# Altium PCB PCB1.PcbDoc (part 1 of 3)
Units mm, origin at the board's own origin, x right, y up, seen from the top; angles counter-clockwise.
Board outline 176 x 144.01 mm, 2 copper layers (Top Layer, Bottom Layer); 148 components, 189 nets, 767 pads, 256 vias.
Unrouted connection lines stored in the file: 30.
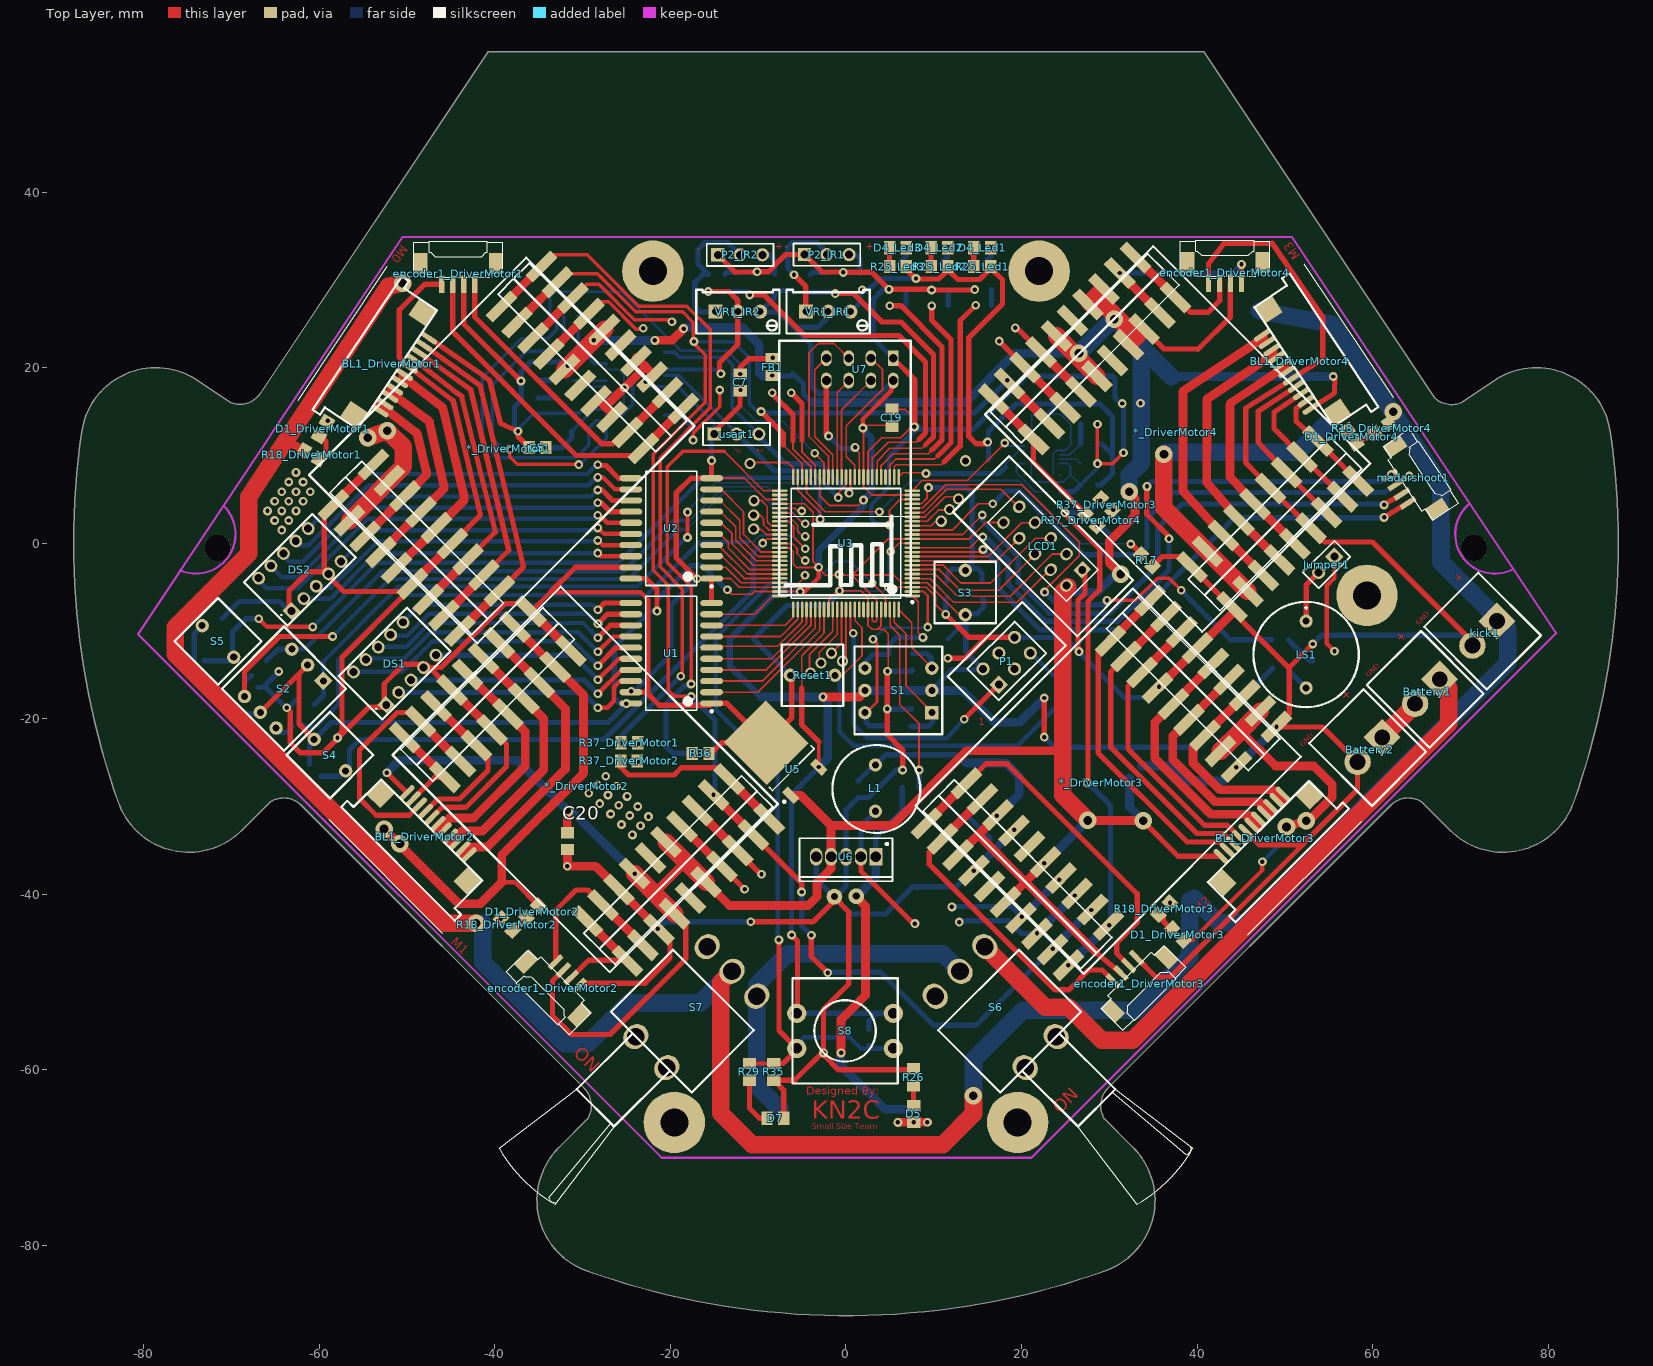
[diagram p0: Top Layer view]
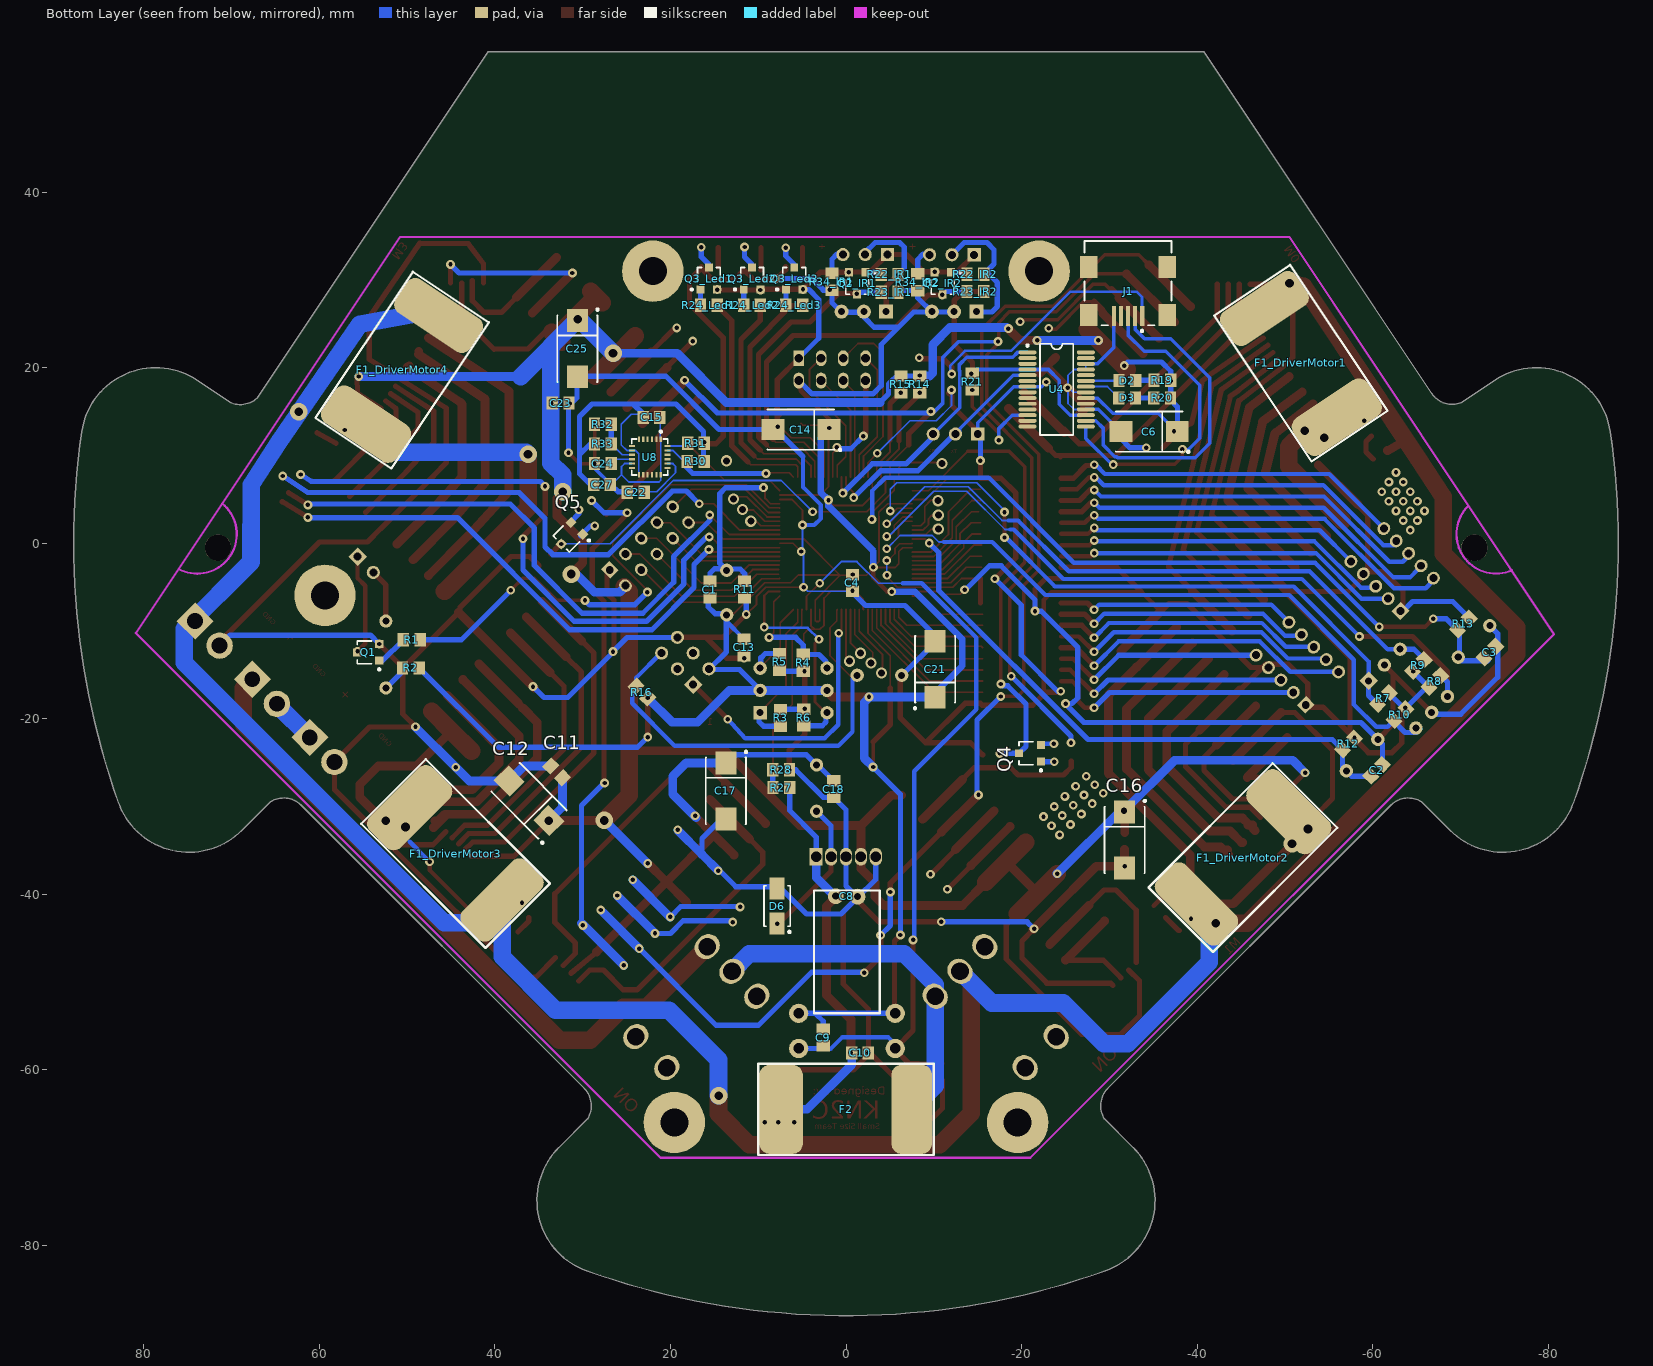
[diagram p1: Bottom Layer view, seen from below]

## Layer stack, top to bottom
Top Layer: signal copper 0.0356
Dielectric: dielectric 0.32, FR-4, Dk 4.8
Bottom Layer: signal copper 0.0356

## Board outline
-62.128,-29.795 -29.795,-62.128 cw(c-31.856,-64.08) -29.44,-65.57 -32.714,-68.845 ccw(c-26.693,-74.867) -29.553,-82.889 ccw(c0,0) 29.554,-82.889 ccw(c26.694,-74.867) 32.715,-68.845 29.44,-65.57 cw(c31.857,-64.08) 29.796,-62.128 62.129,-29.795 cw(c64.081,-31.856) 65.571,-29.44 68.846,-32.714 ccw(c74.868,-26.693) 82.89,-29.553 ccw(c0,0) 87.076,12.724 ccw(c78.649,11.492) 73.925,18.578 70.072,16.009 cw(c69.01,18.642) 67.082,16.558 40.776,56.017 -40.775,56.017 -66.765,17.033 cw(c-69.083,18.671) -70.071,16.009 -73.924,18.578 ccw(c-78.648,11.492) -87.075,12.724 ccw(c0,0) -82.889,-29.553 ccw(c-74.867,-26.693) -68.845,-32.714 -65.57,-29.44 cw(c-64.08,-31.856)

## Design rules (kind name [scope] priority, off if disabled: settings)
Clearance Clearance_3 [InNamedPolygon('Top Layer-gnd') Or  InNamedPolygon('Bottom Layer-gnd')] p1: gap=0.5
Clearance [All] p2: gap=0.2
FabricationTestPointUsage TestPointUsage [All] p1: valid=0 allowmultiple=FALSE
FabricationTestpoint Testpoint [(IsPad And (OnTopLayer Or OnBottomLayer))] p1: side=3 testpointundercomponent=TRUE minsize=1.016 maxsize=2.54 preferedsize=1.524 minholesize=0 maxholesize=1.016 preferedholesize=0.813 testpointgrid=0.025 allowsidetop=TRUE allowsidebottom=TRUE usegrid=TRUE gridtolerance=0
HoleSize [All] p1: absolutevalues=TRUE maxlimit=8 minlimit=0.025 maxpercent=80.000 minpercent=20.000
PolygonConnect [All] p1: connectstyle=Direct reliefconductorwidth=0.254 reliefentries=4 polygonreliefangle="90 Angle" airgapwidth=0.254
RoutingVias [All] p1: holewidth=0.5 width=1 viastyle="Through Hole" minholewidth=0.5 minwidth=1 maxholewidth=2 maxwidth=2
SilkToSolderMaskClearance SilkscreenOverComponentPads [IsPad] p1: minsilkscreentomaskgap=0.254 clearancetoexposedcopper=TRUE
SolderMaskExpansion [All] p1: expansion=0.102
Width [All] p1: maxlimit=2 minlimit=0.2 preferedwidth=0.2
24 further rules are at their usual default settings.

## Classes and differential pairs
net class TX_DRIVER[1..4]: TX_DRIVER1 TX_DRIVER2 TX_DRIVER3 TX_DRIVER4
component class atxmega128a1: C1 C2 C3 DS1 DS2 Jumper1 LCD1 LS1 P1 Q1 R1 R2 R3 R4 R5 R6 R7 R8 R9 R10 R11 R12 R13 R16 R17 R36 Reset1 S1 S2 S3 S4 S5 U1 U2 U3
component class DriverMotor1: *_DriverMotor1 BL1_DriverMotor1 D1_DriverMotor1 encoder1_DriverMotor1 F1_DriverMotor1 R18_DriverMotor1 R37_DriverMotor1
component class DriverMotor2: *_DriverMotor2 BL1_DriverMotor2 D1_DriverMotor2 encoder1_DriverMotor2 F1_DriverMotor2 R18_DriverMotor2 R37_DriverMotor2
component class DriverMotor3: *_DriverMotor3 BL1_DriverMotor3 D1_DriverMotor3 encoder1_DriverMotor3 F1_DriverMotor3 R18_DriverMotor3 R37_DriverMotor3
component class DriverMotor4: *_DriverMotor4 BL1_DriverMotor4 D1_DriverMotor4 encoder1_DriverMotor4 F1_DriverMotor4 R18_DriverMotor4 R37_DriverMotor4
component class FT232: C4 C5 C6 C7 D2 D3 FB1 J1 R19 R20 R21 U4 usart1
component class Led1: D4_Led1 Q3_Led1 R24_Led1 R25_Led1
component class Led2: D4_Led2 Q3_Led2 R24_Led2 R25_Led2
component class Led3: D4_Led3 Q3_Led3 R24_Led3 R25_Led3
component class "Main Sheet": madarshoot1 Q4 Q5 R14 R15
component class Power: Battery1 Battery2 C8 C9 C10 C11 C12 C13 C14 C16 C17 C18 C19 C20 C21 C23 C25 D5 D6 D7 F2 kick1 L1 R26 R27 R28 R29 R35 S6 S7 S8 U5 U6
component class Transceiver: U7
net class LED[1..3]: LED1 LED2 LED3
channel class "Driver Motor": DriverMotor1 DriverMotor2 DriverMotor3 DriverMotor4
channel class Led: Led1 Led2 Led3
component class IR1: P2_IR1 Q2_IR1 R22_IR1 R23_IR1 R34_IR1 VR1_IR1
component class IR2: P2_IR2 Q2_IR2 R22_IR2 R23_IR2 R34_IR2 VR1_IR2
net class IR[1..2]: IR1 IR2
channel class IR: IR1 IR2
component class sensor10DOF-S: C15 C22 C24 C27 R30 R31 R32 R33 U8

## Components (designator, comment, footprint, x,y, rotation, side; value= is the part's Value field where it differs from the comment)
*_DriverMotor1 "Driver Board" "DRIVER BOARD" -39.319,10.744 r135 top locked (schematic designator *)
*_DriverMotor2 "Driver Board" "DRIVER BOARD" -29.54,-26.797 r45 top locked (schematic designator *)
*_DriverMotor3 "Driver Board" "DRIVER BOARD" 29.972,-27.28 r315 top locked (schematic designator *)
*_DriverMotor4 "Driver Board" "DRIVER BOARD" 37.617,11.786 r225 top locked (schematic designator *)
Battery1 "Header 2B" BHDR1X2 66.243,-16.891 r315 top
Battery2 "Header 2B" BHDR1X2 59.69,-23.52 r315 top
BL1_DriverMotor1 "BLDC" FLT11 -51.892,20.295 r56.31 top (schematic designator BL1)
BL1_DriverMotor2 "BLDC" FLT11 -47.828,-33.299 r135 top (schematic designator BL1)
BL1_DriverMotor3 "BLDC" FLT11 47.625,-33.477 r225 top locked (schematic designator BL1)
BL1_DriverMotor4 "BLDC" FLT11 51.791,20.599 r303.69 top locked (schematic designator BL1)
C1 "Cap_UP" 2012[0805] 15.502,-5.286 r270 bottom
C2 "Cap_UP" 2012[0805] -60.452,-25.857 r135 bottom
C3 "Cap_UP" 2012[0805] -73.355,-12.395 r135 bottom
C4 "Cap_UP" 2012[0805] -0.737,-4.521 r90 bottom
C5 "Cap_UP" 2012[0805] -35.154,10.897 r180 top
C6 "Cap_El" 7343 -34.544,12.725 r0 bottom
C7 "Cap_UP" 2012[0805] -12.04,18.339 r90 top
C8 "Cap_El" CAP1000U-16 3.658,-39.548 r270 bottom
C9 "Cap_UP" 2012[0805] 2.591,-56.312 r90 bottom
C10 "Cap_UP" 2012[0805] -1.6,-58.064 r0 bottom
C11 "Cap_UP" 2012[0805] 32.969,-26.035 r225 bottom
C12 "Cap_El" 7343 36.119,-29.337 r45 bottom
C13 "Cap_UP" 2012[0805] 11.608,-11.862 r90 bottom
C14 "Cap_El" 7343 5.131,12.954 r0 bottom
C15 "100nF" 2012[0805] 22.149,14.351 r180 bottom
C16 "Cap_El" 7343 -31.75,-33.807 r270 bottom
C17 "Cap_El" 7343 13.691,-28.219 r270 bottom
C18 "Cap_UP" 2012[0805] 1.397,-28.016 r90 bottom
C19 "Cap_UP" 2012[0805] 5.232,14.3 r270 top
C20 "Cap_UP" 2012[0805] -31.725,-33.934 r90 top
C21 "Cap_El" 7343 -10.16,-14.351 r90 bottom
C22 "2.2nF" 2012[0805] 23.952,5.817 r180 bottom
C23 "Cap_UP" 2012[0805] 32.512,15.977 r0 bottom
C24 "100nF" 2012[0805] 27.703,9.085 r180 bottom
C25 "Cap_El" 7343 30.607,22.174 r270 bottom
C27 "100nF" 2012[0805] 27.788,6.68 r0 bottom
D1_DriverMotor1 "Diode" 2012[0805] -59.588,13.03 r60 top (schematic designator D1)
D1_DriverMotor2 "Diode" 2012[0805] -35.738,-41.961 r45 top (schematic designator D1)
D1_DriverMotor3 "Diode" 2012[0805] 37.821,-44.577 r315 top (schematic designator D1)
D1_DriverMotor4 "Diode" 2012[0805] 57.633,12.116 r123.69 top (schematic designator D1)
D2 "Diode" 2012[0805] -32.055,18.542 r0 bottom
D3 "Diode" 2012[0805] -32.029,16.561 r0 bottom
D4_Led1 "Diode" 2012[0805] 15.519,33.68 r0 top (schematic designator D4)
D4_Led2 "Diode" 2012[0805] 10.643,33.68 r0 top (schematic designator D4)
D4_Led3 "Diode" 2012[0805] 5.918,33.68 r0 top (schematic designator D4)
D5 "Diode" 2012[0805] 7.722,-65.014 r90 top
D6 "Diode" US1M 7.849,-41.326 r270 bottom
D7 "Diode" 2012[0805] -8.052,-65.507 r0 top
DS1 "7Seg Blue-CC" "7Segment Small" -51.422,-13.703 r315 top
DS2 "7Seg Blue-CC" "7Segment Small" -62.23,-3.023 r315 top
encoder1_DriverMotor1 "Header 2X2" "encoder 4pin" -44.171,31.826 r0 top (schematic designator encoder1)
encoder1_DriverMotor2 "Header 2X2" "encoder 4pin" -33.376,-50.673 r135 top (schematic designator encoder1)
encoder1_DriverMotor3 "Header 2X2" "encoder 4pin" 33.401,-50.165 r225 top (schematic designator encoder1)
encoder1_DriverMotor4 "Header 2X2" "encoder 4pin" 43.18,31.953 r0 top (schematic designator encoder1)
F1_DriverMotor1 "Fuse" "FUSE KH" -51.816,20.523 r326.31 bottom locked (schematic designator F1)
F1_DriverMotor2 "Fuse" "FUSE KH" -45.212,-35.814 r225 bottom (schematic designator F1)
F1_DriverMotor3 "Fuse" "FUSE KH" 44.475,-35.357 r135 bottom (schematic designator F1)
F1_DriverMotor4 "Fuse" "FUSE KH" 50.571,19.736 r33.69 bottom (schematic designator F1)
F2 "Fuse" "FUSE KH" 0,-64.491 r90 bottom locked
FB1 "Ferrite Beed" 2012[0805] -8.407,20.066 r90 top
J1 "USB" USB_MINI -32.131,29.845 r0 bottom
Jumper1 "Header 2" HDR1X2 55.651,-1.524 r225 top
kick1 "Header 2B" BHDR1X2 72.771,-10.262 r315 top
L1 "Inductor" inductor 3.353,-27.889 r90 top
LCD1 "Header 5X2" HDRBOX2X5 22.454,-0.33 r135 top locked
LS1 "Buzzer" BUZZER 52.426,-12.675 r270 top
madarshoot1 "Header 4" sucket-smd-4pin 64.973,7.544 r303.7 top
P1 "Header 3X2" HDRBOX2X3 18.313,-13.411 r45 top
P2_IR1 "Encoder 1" HDR1X3 -4.724,32.893 r0 top (schematic designator P2)
P2_IR2 "Encoder 1" HDR1X3 -14.605,32.868 r0 top (schematic designator P2)
Q1 "2N2222" SOT-23 54.432,-12.421 r90 bottom
Q2_IR1 "2N2222" SOT-23 -1.27,29.616 r0 bottom (schematic designator Q2)
Q2_IR2 "2N2222" SOT-23 -11.024,29.616 r0 bottom (schematic designator Q2)
Q3_Led1 "2N2222" SOT-23 15.626,30.164 r180 bottom (schematic designator Q3)
Q3_Led2 "2N2222" SOT-23 10.698,30.164 r180 bottom (schematic designator Q3)
Q3_Led3 "2N2222" SOT-23 5.898,30.164 r180 bottom (schematic designator Q3)
Q4 "Diac-PNP" DIODE-COMCATHOD -21.022,-23.943 r90 bottom
Q5 "Diac-PNP" DIODE-COMCATHOD 31.496,0.838 r45 bottom
R1 "Res" 2012[0805] 49.479,-10.998 r0 bottom
R2 "Res" 2012[0805] 49.581,-14.199 r0 bottom
R3 "Res" 2012[0805] 7.446,-19.883 r270 bottom
R4 "Res" 2012[0805] 4.878,-13.615 r90 bottom
R5 "Res" 2012[0805] 7.572,-13.507 r90 bottom
R6 "Res" 2012[0805] 4.806,-19.865 r270 bottom
R7 "Res" 2012[0805] -61.239,-17.678 r315 bottom
R8 "Res" 2012[0805] -67.081,-15.723 r135 bottom
R9 "Res" 2012[0805] -65.202,-13.919 r135 bottom
R10 "Res" 2012[0805] -63.119,-19.507 r315 bottom
R11 "Res" 2012[0805] 11.549,-5.257 r270 bottom
R12 "Res" 2012[0805] -57.252,-22.86 r135 bottom
R13 "Res" 2012[0805] -70.333,-9.195 r135 bottom
R14 "Res" 2012[0805] -8.407,18.11 r90 bottom
R15 "Res" 2012[0805] -6.248,18.11 r90 bottom
R16 "10K" 2012[0805] 23.261,-16.952 r45 bottom
R17 "Res" 2012[0805] 34.265,-1.93 r135 top
R18_DriverMotor1 "Res" 2012[0805] -60.884,10.084 r330 top (schematic designator R18)
R18_DriverMotor2 "Res" 2012[0805] -38.633,-43.434 r315 top (schematic designator R18)
R18_DriverMotor3 "Res" 2012[0805] 36.246,-41.631 r225 top (schematic designator R18)
R18_DriverMotor4 "Res" 2012[0805] 61.062,13.106 r213.69 top (schematic designator R18)
R19 "Res" 2012[0805] -36.043,18.567 r180 bottom
R20 "Res" 2012[0805] -36.017,16.561 r180 bottom
R21 "Res" 2012[0805] -14.376,18.415 r90 bottom
R22_IR1 "Res" 2012[0805] -4.978,30.632 r180 bottom (schematic designator R22)
R22_IR2 "Res" 2012[0805] -14.732,30.658 r180 bottom (schematic designator R22)
R23_IR1 "Res" 2012[0805] -4.978,28.6 r0 bottom (schematic designator R23)
R23_IR2 "Res" 2012[0805] -14.732,28.677 r0 bottom (schematic designator R23)
R24_Led1 "Res" 2012[0805] 15.626,27.116 r0 bottom (schematic designator R24)
R24_Led2 "Res" 2012[0805] 10.698,27.116 r0 bottom (schematic designator R24)
R24_Led3 "Res" 2012[0805] 5.898,27.116 r0 bottom (schematic designator R24)
R25_Led1 "Res" 2012[0805] 15.519,31.521 r0 top (schematic designator R25)
R25_Led2 "Res" 2012[0805] 10.668,31.521 r0 top (schematic designator R25)
R25_Led3 "Res" 2012[0805] 5.918,31.521 r0 top (schematic designator R25)
R26 "Res" 2012[0805] 7.696,-60.833 r270 top
R27 "Res" 2012[0805] 7.366,-27.838 r180 bottom
R28 "Res" 2012[0805] 7.391,-25.806 r0 bottom
R29 "Res" 2012[0805] -10.998,-60.223 r90 top
R30 "4K7" 2012[0805] 17.12,9.322 r0 bottom
R31 "4K7" 2012[0805] 17.094,11.405 r0 bottom
R32 "1K-JSEL-MPU-MODE" 2012[0805] 27.703,13.555 r0 bottom
R33 "1K-JSEL-MPU-MODE" 2012[0805] 27.703,11.32 r180 bottom
R34_IR1 "Res" 2012[0805] 1.6,29.794 r90 bottom (schematic designator R34)
R34_IR2 "Res" 2012[0805] -8.179,29.743 r90 bottom (schematic designator R34)
R35 "Res" 2012[0805] -8.23,-60.223 r90 top
R36 "Res" 2012[0805] -16.561,-23.935 r180 top
R37_DriverMotor1 "Res" 2012[0805] -24.689,-22.716 r0 top (schematic designator R37)
R37_DriverMotor2 "Res" 2012[0805] -24.714,-24.799 r0 top (schematic designator R37)
R37_DriverMotor3 "Res" 2012[0805] 29.693,4.42 r315 top (schematic designator R37)
R37_DriverMotor4 "Res" 2012[0805] 27.96,2.651 r315 top (schematic designator R37)
Reset1 "SW-SPST" PUSH-BUT -3.81,-15.037 r270 top
S1 "SW-Hex" SW-HEX 5.969,-16.764 r90 top
S2 "SW-Hex" SW-HEX -64.033,-16.561 r135 top locked
S3 "SW-SPST" PUSH-BUT 13.589,-5.613 r180 top
S4 "SW-SPST" PUSH-BUT -58.801,-24.13 r45 top locked
S5 "SW-SPST" PUSH-BUT -71.552,-11.176 r45 top locked
S6 "SW-SPDT" KEYKHRAB 18.644,-54.432 r135 top
S7 "SW-SPDT" KEYKHRAB -18.644,-54.432 r45 top
S8 "SW-SPST" "PUSH BUTTON B" 5.893,-49.555 r180 top locked
U1 "74ACT541SC" M20B_M -19.914,-12.522 r180 top locked
U2 "74ACT541SC" M20B_M -19.914,1.702 r180 top locked
U3 "ATXmega128A1" 100A_N 0,0 r180 top locked
U4 "FT232RL" SSOP28 -24.003,17.526 r270 bottom
U5 "LF33" D-PACK -7.772,-24.028 r135 top
U6 "LM2576HVT-5.0" T05A 0,-35.712 r180 top
U7 "nrf24L01" NRF24L01 5.385,21.082 r270 top locked
U8 "MPU6050" QFN_36 22.394,10.761 r0 bottom
usart1 "Encoder 1" HDR1X3 -15.011,12.446 r0 top
VR1_IR1 "Res Tap" MULTITURN -2.032,26.391 r0 top (schematic designator VR1)
VR1_IR2 "Res Tap" MULTITURN -12.319,26.391 r0 top (schematic designator VR1)

## Footprints (in the part's own frame and the unit in brackets; to place one, negate y for a bottom-side part, rotate by r counter-clockwise, add the part's x,y. Pads: shape width x height; smd on the part's side, far side on the other; paste and mask are expansions set on the pad)
"7Segment Small" [mm]
  rect 1.5x1.4 hole 0.9: 1(2.65,-4)
  oval 1.5x1.4 hole 0.9: 2(2.65,-2) 3(2.65,0) 4(2.65,2) 5(2.65,4) 6(-2.65,4) 7(-2.65,2) 8(-2.65,0) 9(-2.65,-2) 10(-2.65,-4)
  silkscreen extent -3.5,-5.5 3.5,5.5, body extent -3.54,-5.48 3.5,5.55, height 4.8
100A_N [mm] "Thin QFP, 100-Leads, Body 14x14mm, Pitch 0.5mm, IPC Medium Density"
  oval 1.8x0.3 smd: 1(-7.55,6) 2(-7.55,5.5) 3(-7.55,5) 4(-7.55,4.5) 5(-7.55,4) 6(-7.55,3.5) 7(-7.55,3) 8(-7.55,2.5) 9(-7.55,2) 10(-7.55,1.5) 11(-7.55,1) 12(-7.55,0.5) 13(-7.55,0) 14(-7.55,-0.5) 15(-7.55,-1) 16(-7.55,-1.5) 17(-7.55,-2) 18(-7.55,-2.5) 19(-7.55,-3) 20(-7.55,-3.5) 21(-7.55,-4) 22(-7.55,-4.5) 23(-7.55,-5) 24(-7.55,-5.5) 25(-7.55,-6) 51(7.55,-6) 52(7.55,-5.5) 53(7.55,-5) 54(7.55,-4.5) 55(7.55,-4) 56(7.55,-3.5) 57(7.55,-3) 58(7.55,-2.5) 59(7.55,-2) 60(7.55,-1.5) 61(7.55,-1) 62(7.55,-0.5) 63(7.55,0) 64(7.55,0.5) 65(7.55,1) 66(7.55,1.5) 67(7.55,2) 68(7.55,2.5) 69(7.55,3) 70(7.55,3.5) 71(7.55,4) 72(7.55,4.5) 73(7.55,5) 74(7.55,5.5) 75(7.55,6)
  oval 0.3x1.8 smd: 26(-6,-7.55) 27(-5.5,-7.55) 28(-5,-7.55) 29(-4.5,-7.55) 30(-4,-7.55) 31(-3.5,-7.55) 32(-3,-7.55) 33(-2.5,-7.55) 34(-2,-7.55) 35(-1.5,-7.55) 36(-1,-7.55) 37(-0.5,-7.55) 38(0,-7.55) 39(0.5,-7.55) 40(1,-7.55) 41(1.5,-7.55) 42(2,-7.55) 43(2.5,-7.55) 44(3,-7.55) 45(3.5,-7.55) 46(4,-7.55) 47(4.5,-7.55) 48(5,-7.55) 49(5.5,-7.55) 50(6,-7.55) 76(6,7.55) 77(5.5,7.55) 78(5,7.55) 79(4.5,7.55) 80(4,7.55) 81(3.5,7.55) 82(3,7.55) 83(2.5,7.55) 84(2,7.55) 85(1.5,7.55) 86(1,7.55) 87(0.5,7.55) 88(0,7.55) 89(-0.5,7.55) 90(-1,7.55) 91(-1.5,7.55) 92(-2,7.55) 93(-2.5,7.55) 94(-3,7.55) 95(-3.5,7.55) 96(-4,7.55) 97(-4.5,7.55) 98(-5,7.55) 99(-5.5,7.55) 100(-6,7.55)
  silkscreen extent -7.68,-6.25 6.25,6.82, body extent -7,-7 7,7, height 1.2
2012[0805] [mm] "Chip Resistor; Body 2.0 x 1.3 mm (LxW typ)"
  rect 1.3x1.5 smd: 1(-0.95,0) 2(0.95,0)
  body extent -1.22,-0.75 1.28,0.75, height 0.5
7343 [mm] "Capacitor, SM Tantalum; Body 7.3 x 4.3 mm (LxW typ)"
  rect 2.6x2.4 smd: 1(-3.2,0) 2(3.2,0)
  silkscreen extent -4.57,-2.3 3.8,2.42, body extent -3.9,-2.4 3.9,2.4, height 2
BHDR1X2 [mm]
  rect 3x3 hole 1.8: 1(0,1.98)
  round 3 hole 1.8: 2(0,-1.98)
  silkscreen extent -5.4,-4.35 4.7,4.35, body extent -5.53,-4.47 4.77,4.48, height 12.5
BUZZER [mm]
  round 1.5 hole 0.8: 1(-3.81,0) 2(3.81,0)
  silkscreen extent -6,-6 6,6, body extent -5.97,-6 5.97,5.97, height 9.3
CAP1000U-16 [mm]
  round 1.8 hole 0.8: 1(0.66,2.489) 2(0.711,4.978)
  silkscreen extent 0,0 14,7.5
D-PACK [mm] "D-PAK, 3-Pads, Body 6.2x6.7mm (max), IPC Medium Density"
  rect 1.9x0.95 smd: 1(-4.35,2.28) 3(-4.35,-2.28)
  rect 6.9x6.8 smd: 4(1.85,0)
  silkscreen extent -4.47,-3.35 -2,3.43, body extent -2.5,-3.35 3.7,3.35, height 2.38
DIODE-COMCATHOD [mm]
  rect 0.9x0.95 smd: 1(0.02,1.311) 2(-0.93,-1.189) 3(0.97,-1.189)
  silkscreen extent -2.05,-1.31 1.32,1.31, body extent -1.3,-0.31 1.35,1.31, height 2
"DRIVER BOARD" [mm]
  rect 1.2x4 smd: 1(11.43,-17.982) 1(11.43,-11.52) 2(8.89,-17.982) 2(8.89,-11.52) 3(6.35,-11.52) 3(6.35,-17.982) 4(3.81,-11.52) 4(3.81,-17.982) 5(1.27,-17.982) 5(1.27,-11.52) 6(-1.27,-11.52) 6(-1.27,-17.982) 7(-3.81,-17.982) 7(-3.81,-11.52) 8(-6.35,-17.982) 8(-6.35,-11.52) 9(-8.89,-11.52) 9(-8.89,-17.982) 10(-11.43,-11.52) 10(-11.43,-17.982) 11(8.966,17.982) 11(8.997,11.525) 12(6.426,17.982) 12(6.457,11.525) 13(3.886,17.982) 13(3.917,11.525) 14(1.346,17.982) 14(1.377,11.525) 15(-1.194,17.982) 15(-1.163,11.525) 16(-3.734,17.982) 16(-3.703,11.525) 17(-6.274,17.982) 17(-6.243,11.525) 18(-8.814,17.982) 18(-8.783,11.525) 19(-11.354,17.982) 19(-11.323,11.525)
  silkscreen extent -13.74,-17.46 13.36,17.54
"encoder 4pin" [mm]
  rect 1.6x2.4 smd: 0(-4.3,0.047) 0(4.3,0.047)
  rect 0.6x2 smd: 1(-1.875,-2.3) 2(-0.625,-2.3) 3(0.625,-2.3) 4(1.875,-2.3)
  silkscreen extent -5.07,-1.53 5.07,2.59, body extent -5.07,-2.15 5.07,2.62, height 3.5
FLT11 [mm]
  rect 2.2x2.4 smd: 0(-7,0.3) 0(7,0.3)
  oval 0.6x2.2 smd: 1(-5,-1.9) 2(-4,-1.9) 3(-3,-1.9) 4(-2,-1.9) 5(-1,-1.9) 6(0,-1.9) 7(1,-1.9) 8(2,-1.9) 9(3,-1.9) 10(4,-1.9) 11(5,-1.9)
  silkscreen extent -9.15,-0.9 9.15,6.56, body extent -9.15,-0.9 9.15,4.6, height 3
"FUSE KH" [mm]
  rrect50% 10.2x5 smd: 1(0,7.4)
  rrect50% 10.2x4.6 smd: 2(0,-7.48)
  silkscreen extent -5.2,-10 5.2,10
HDR1X2 [mm] "Connector; Header; 2 Position"
  rect 1.5x1.5 hole 0.9: 1(0,0)
  round 1.5 hole 0.9: 2(2.54,0)
  silkscreen extent -1.27,-1.27 3.81,1.27
HDR1X3 [mm] "Connector; Header; 3 Position"
  rect 1.5x1.5 hole 0.9: 1(0,0)
  round 1.5 hole 0.9: 2(2.54,0) 3(5.08,0)
  silkscreen extent -1.27,-1.27 6.35,1.27
HDRBOX2X3 [mm]
  rect 1.5x1.5 hole 0.9: 1(-2.54,-1.27)
  round 1.5 hole 0.9: 2(-2.54,1.27) 3(0,-1.27) 4(0,1.27) 5(2.54,-1.27) 6(2.54,1.27)
  silkscreen extent -6,-3.5 6,3.5, body extent -6,-3.53 6,3.47, height 4
HDRBOX2X5 [mm]
  rect 1.3x1.5 hole 0.9: 1(-5.062,-1.254)
  oval 1.3x1.5 hole 0.9: 2(-5.062,1.286) 3(-2.522,-1.254) 4(-2.522,1.286) 5(0.018,-1.254) 6(0.018,1.286) 7(2.558,-1.254) 8(2.558,1.286) 9(5.098,-1.254) 10(5.098,1.286)
  silkscreen extent -10,-4.5 10,4.5, body extent -10.03,-4.53 -9.97,4.45, height 4
inductor [mm]
  round 1.5 hole 0.8: 1(-2.64,0) 2(2.64,0)
  silkscreen extent -5.11,-5.11 4.91,4.9
KEYKHRAB [mm]
  oval 3x2.6 hole 2: 0(-5,-2.5) 0(-5,2.5) 1(8,4) 2(8,0) 3(8,-4)
  silkscreen extent -25.59,-6.5 5,6.5, body extent -25.6,-6.5 4.97,6.5, height 8
M20B_M [mm] "SOIC, 20-Leads, Body 12.8x7.5mm, Pitch 1.27mm, IPC Low Density"
  oval 2.6x0.7 smd: 1(-4.6,5.715) 2(-4.6,4.445) 3(-4.6,3.175) 4(-4.6,1.905) 5(-4.6,0.635) 6(-4.6,-0.635) 7(-4.6,-1.905) 8(-4.6,-3.175) 9(-4.6,-4.445) 10(-4.6,-5.715) 11(4.6,-5.715) 12(4.6,-4.445) 13(4.6,-3.175) 14(4.6,-1.905) 15(4.6,-0.635) 16(4.6,0.635) 17(4.6,1.905) 18(4.6,3.175) 19(4.6,4.445) 20(4.6,5.715)
  silkscreen extent -4.72,-6.5 2.9,6.74, body extent -3.75,-6.5 3.75,6.5, height 2.6
MULTITURN [mm]
  rect 1.6x1.6 hole 0.8: 1(-2.54,0)
  round 1.6 hole 0.8: 2(0,0) 3(2.54,0)
  silkscreen extent -4.75,-2.5 4.75,2.5, body extent -4.77,-2.5 4.72,2.52, height 4
NRF24L01 [mm]
  rect 1.8x1.2 hole 1: 1(0,0)
  oval 1.8x1.2 hole 1: 2(2.54,0) 3(0,-2.54) 4(2.54,-2.54) 5(0,-5.08) 6(2.54,-5.08) 7(0,-7.62) 8(2.54,-7.62)
  silkscreen extent -2,-13 27,2
"PUSH BUTTON B" [mm]
  round 2.2 hole 1.2: 1(0.5,8) 1(11.5,8) 2(0.5,4) 2(11.5,4)
  silkscreen extent 0,0 12,12
PUSH-BUT [mil]
  round 60 hole 31.5: 1(0,-100) 2(0,100)
  silkscreen extent -138,-138 138,138, body extent -139,-139 139,139, height 157
QFN_36 [mm]
  rect 0.25x0.65 smd: 1(-1.292,-1.094) 2(-0.792,-1.094) 3(-0.292,-1.094) 4(0.208,-1.094) 5(0.708,-1.094) 6(1.208,-1.094) 13(1.208,2.956) 14(0.708,2.956) 15(0.208,2.956) 16(-0.292,2.956) 17(-0.792,2.956) 18(-1.292,2.956)
  rect 0.65x0.25 smd: 7(1.983,-0.319) 8(1.983,0.181) 9(1.983,0.681) 10(1.983,1.181) 11(1.983,1.681) 12(1.983,2.181) 19(-2.067,2.181) 20(-2.067,1.681) 21(-2.067,1.181) 22(-2.067,0.681) 23(-2.067,0.181) 24(-2.067,-0.319)
  silkscreen extent -2.09,-2.09 2.01,2.98, body extent -2.09,-1.12 2.01,2.98, height 0.95
SOT-23 [mm] "SOT-23; 3 Leads; Body 3.0 x 2.6 mm, inc. leads (LxW max)"
  rect 0.9x0.95 smd: 1(0,1.25) 2(-0.95,-1.25) 3(0.95,-1.25)
  silkscreen extent -2.07,-1.37 1.3,1.25, body extent -1.33,-0.38 1.33,1.25, height 2
SSOP28 [mm] "SSOP; 28 Leads; Body Width 5.3 mm; Pitch 0.65 mm"
  oval 0.45x2.05 smd: 1(-4.225,-3.325) 2(-3.575,-3.325) 3(-2.925,-3.325) 4(-2.275,-3.325) 5(-1.625,-3.325) 6(-0.975,-3.325) 7(-0.325,-3.325) 8(0.325,-3.325) 9(0.975,-3.325) 10(1.625,-3.325) 11(2.275,-3.325) 12(2.925,-3.325) 13(3.575,-3.325) 14(4.225,-3.325) 15(4.225,3.325) 16(3.575,3.325) 17(2.925,3.325) 18(2.275,3.325) 19(1.625,3.325) 20(0.975,3.325) 21(0.325,3.325) 22(-0.325,3.325) 23(-0.975,3.325) 24(-1.625,3.325) 25(-2.275,3.325) 26(-2.925,3.325) 27(-3.575,3.325) 28(-4.225,3.325)
  silkscreen extent -5.2,-3.45 5.2,1.9, body extent -5.2,-2.4 5.23,2.42, height 2
sucket-smd-4pin [mm]
  rect 1.6x2.4 smd: 0(-4.238,-0.067) 0(4.362,-0.067)
  rect 0.6x2 smd: 1(-1.813,-2.414) 2(-0.563,-2.414) 3(0.687,-2.414) 4(1.937,-2.414)
  silkscreen extent -5.01,-1.64 5.14,2.48, body extent -5,-2.2 5.15,2.58, height 3.5
SW-HEX [mil]
  rect 60x60 hole 31.5: 1(-100,-150)
  round 60 hole 31.5: 2(0,-150) 3(100,-150) 4(100,150) 5(0,150) 6(-100,150)
  silkscreen extent -197,-197 197,197, body extent -198,-199 195,197, height 79
T05A [mm] "TO, Thru-Hole, Vertical, Heatsink Mounted; 5 In-Line Leads; Pitch 1.70 mm"
  rect 1.5x2 hole 1.2: 1(-3.4,0)
  oval 1.4x2 hole 1.2: 2(-1.7,0) 3(0,0) 4(1.7,0) 5(3.4,0)
  silkscreen extent -5.3,-2.1 5.3,2.8, body extent -5.35,-2.15 5.35,2.85, height 19.6
US1M [mm] "Molded Diode, 2-Leads, Body 4.3x2.6mm, IPC Medium Density"
  rect 2.5x1.7 smd: 1(-2,0) 2(2,0)
  silkscreen extent -2.3,-1.5 3.07,1.52, body extent -2.3,-1.46 2.3,1.46, height 2.3
USB_MINI [mm]
  rect 0.5x2.3 smd: 1(-1.6,3.95) 2(-0.8,3.95) 3(0,3.95) 4(0.8,3.95) 5(1.6,3.95)
  rect 2x2.5 smd: 6(4.45,3.85) 7(4.45,-1.65) 8(-4.45,3.85) 9(-4.45,-1.65)
  silkscreen extent -4.95,-4.6 4.95,5.77

## Part data
C1 C2 C3 C4 C5 C6 C7 C8 C9 C10 C11 C12 C13 C14 C16 C17 C18 C19 C20 C21 C23 C25: "Capacitor"
C15 C22 C24 C27: library part Cap, "Capacitor"
D1_DriverMotor1 D1_DriverMotor2 D1_DriverMotor3 D1_DriverMotor4 D2 D3 D4_Led1 D4_Led2 D4_Led3 D5 D6 D7: "1 Amp General Purpose Rectifier"
DS1 DS2: library part "7Seg Blue-CC_1", "14.2 mm General Purpose Blue 7-Segment Display: CC, RH DP, Gray Surface"
encoder1_DriverMotor1 encoder1_DriverMotor2 encoder1_DriverMotor3 encoder1_DriverMotor4: "Header, 2-Pin, Dual row"
J1: "USB 1.1, Right Angle, Thru-Hole, A Type, Receptacle, 4 Position, Black"
Jumper1: "Header, 2-Pin"
LCD1: "Header, 5-Pin, Dual row"
LS1: "Magnetic Transducer Buzzer"
madarshoot1: "Header, 4-Pin"
P1: "Header, 3-Pin, Dual row"
P2_IR1 P2_IR2 usart1: library part "Header 3", "Header, 3-Pin"
Q1 Q2_IR1 Q2_IR2 Q3_Led1 Q3_Led2 Q3_Led3: "NPN Bipolar Transistor"
Q4 Q5: "DIAC"
R1 R2 R3 R4 R5 R6 R7 R8 R9 R10 R11 R12 R13 R14 R15 R17 R18_DriverMotor1 R18_DriverMotor2 R18_DriverMotor3 R18_DriverMotor4 R19 R20 R21 R22_IR1 R22_IR2 R23_IR1 R23_IR2 R24_Led1 R24_Led2 R24_Led3 R25_Led1 R25_Led2 R25_Led3 R26 R27 R28 R29 R34_IR1 R34_IR2 R35 R36 R37_DriverMotor1 R37_DriverMotor2 R37_DriverMotor3 R37_DriverMotor4: "Semiconductor Resistor"
R16: library part Res, "Semiconductor Resistor"
R30 R31: library part Res3, "Resistor"
R32 R33: library part Res1, "Resistor"
Reset1 S3 S4 S5 S8: "Single-Pole, Single-Throw Switch"
S6 S7: "SPDT Subminiature Toggle Switch, Right Angle Mounting, Vertical Actuation"
U1 U2: "Octal Buffer/Line Driver with 3-State Output"
U5: library part 7805
U6: "SIMPLE SWITCHER; 3A Step-Down Voltage Regulator"
VR1_IR1 VR1_IR2: "Tapped Resistor"

## Free pads (board coordinates)
  round 7 hole 3.2: 0(-22,31) 0(-19.558,-65.989) 0(19.558,-65.989) 0(22,31) 0(59.363,-5.937)
  round 3 hole 3: sp(-71.603,-0.508) sp(71.552,-0.508)

## Via types
v1: diameter 1, hole 0.5, Top Layer to Bottom Layer, 225 vias
v2: diameter 2, hole 1, Top Layer to Bottom Layer, 17 vias
v3: diameter 1.27, hole 0.8, Top Layer to Bottom Layer, 12 vias
v4: diameter 1, hole 0.5, Top Layer to Bottom Layer, tented top, 1 vias
v5: diameter 1.27, hole 0.711, Top Layer to Bottom Layer, 1 vias

## Nets (pads, with @x,y where several pads share a name; then routed paths per layer and width w, separated by ;. In a path a pad name is that pad's centre, name@x,y a point inside that pad or via, vN(x,y) a via of type N, cw(c..) or ccw(c..) an arc to the next point about the centre after c; other vN are vias at no path point)
1A: DS1.6 U1.11 | length 27.3
  Top Layer w0.6: v1(-28.27,-7.569) -27.508,-6.807 U1.11@-24.514,-6.807
  Bottom Layer w0.5: DS1.6@-50.468,-9.001 -48.452,-6.985 -28.854,-6.985 v1(-28.27,-7.569)
1B: DS1.5 U1.16 | length 24.4
  Top Layer w0.5: v1(-28.27,-15.552) -25.875,-13.157 U1.16@-24.514,-13.157
  Bottom Layer w0.6: DS1.5@-46.72,-12.749 -31.074,-12.749 v1(-28.27,-15.552)
1C: DS1.3 U1.17 | length 27
  Top Layer w0.5: v1(-28.27,-17.149) -25.549,-14.427 U1.17@-24.514,-14.427
  Bottom Layer w0.6: DS1.3@-49.548,-15.577 -29.842,-15.577 v1(-28.27,-17.149) ; DS1.3@-49.403,-15.215 DS1.3@-49.294,-15.323
1D: DS1.10 U1.15 | length 35.2
  Top Layer w0.6: v1(-28.27,-13.955) -26.202,-11.887 U1.15@-24.514,-11.887
  Bottom Layer w0.5: DS1.10@-56.083,-14.224 -55.658,-14.649 -50.616,-14.649 -47.142,-11.176 -31.05,-11.176 v1(-28.27,-13.955)
1DP: DS1.2 U1.18 | length 29.6
  Top Layer w0.5: v1(-28.27,-18.745) -27.203,-18.745 -26.467,-18.009 -26.467,-16.408 -25.756,-15.697 U1.18@-24.514,-15.697
  Bottom Layer w0.6: DS1.2@-50.963,-16.991 -30.024,-16.991 v1(-28.27,-18.745) ; DS1.2@-50.902,-16.586 DS1.2@-50.73,-16.758
1E: DS1.9 U1.14 | length 33.1
  Top Layer w0.5: v1(-28.27,-12.359) -26.528,-10.617 U1.14@-24.514,-10.617
  Bottom Layer w0.5: DS1.9@-54.635,-12.875 -54.379,-13.132 -50.343,-13.132 -47.339,-10.128 -30.501,-10.128 v1(-28.27,-12.359)
1F: DS1.7 U1.12 | length 29.5
  Top Layer w0.6: v1(-28.27,-9.166) -27.182,-8.077 U1.12@-24.514,-8.077
  Bottom Layer w0.5: DS1.7@-51.841,-10.047 -51.347,-10.541 -50.013,-10.541 -47.504,-8.033 -29.403,-8.033 v1(-28.27,-9.166)
1G: DS1.8 U1.13 | length 31.5
  Top Layer w0.6: v1(-28.27,-10.762) -26.855,-9.347 U1.13@-24.514,-9.347
  Bottom Layer w0.5: DS1.8@-53.467,-11.557 -53.238,-11.786 -50.089,-11.786 -47.384,-9.08 -29.952,-9.08 v1(-28.27,-10.762)
2A: DS2.6 U2.11 | length 40.3
  Top Layer w0.6: v1@-28.169,8.865 -27.356,8.865 -25.908,7.417 U2.11@-24.514,7.417
  Bottom Layer w0.5: DS2.6@-61.421,1.546 DS2.6@-61.281,1.685 ; DS2.6@-61.275,1.68 -55.056,7.899 -29.489,7.899 v1@-28.448,8.941
  Bottom Layer w0.6: v1@-28.372,8.814 v1@-28.346,8.839
  other v1: -28.296,8.941
2B: DS2.5 U2.16 | length 35.1
  Top Layer w0.5: v1@-28.296,1.803 -27.559,1.067 U2.16@-24.514,1.067
  Bottom Layer w0.5: DS2.5@-57.528,-2.068 -53.965,1.494 -28.557,1.494 v1(-28.296,1.756)
  Bottom Layer w0.6: DS2.5@-57.655,-2.22 DS2.5@-57.515,-2.081
2C: DS2.3 U2.17 | length 38.3
  Top Layer w0.5: v1@-28.296,0.356 -27.737,-0.203 U2.17@-24.514,-0.203
  Bottom Layer w0.5: DS2.3@-60.483,-5.049 -58.643,-5.049 -53.381,0.213 v1@-28.402,0.213
  other v1: -28.296,0.319
2D: DS2.10 U2.15 | length 46.8
  Top Layer w0.5: v1@-28.296,3.226 -28.095,3.226 -27.206,2.337 U2.15@-24.514,2.337
  Bottom Layer w0.5: DS2.10@-67.059,-4.13 -66.058,-5.131 -62.433,-5.131 -54.527,2.775 -28.713,2.775 v1(-28.296,3.193)
2DP: DS2.2 U2.18 | length 39.6
  Top Layer w0.5: v1(-28.296,-1.118) -27.94,-1.473 U2.18@-24.514,-1.473
  Bottom Layer w0.5: DS2.2@-61.77,-6.311 -58.736,-6.311 -53.543,-1.118 v1(-28.296,-1.118)
2E: DS2.9 U2.14 | length 44.9
  Top Layer w0.6: v1(-28.296,4.63) -27.922,4.63 -26.899,3.607 U2.14@-24.514,3.607
  Bottom Layer w0.5: DS2.9@-65.123,-3.023 -64.259,-3.886 -62.382,-3.886 -54.44,4.056 -28.869,4.056 v1(-28.296,4.63)
2F: DS2.7 U2.12 | length 42.1
  Top Layer w0.5: v1@-28.296,7.544 -27.722,7.544 -26.325,6.147 U2.12@-24.514,6.147
  Bottom Layer w0.5: DS2.7@-62.817,0.113 -62.5,-0.203 -61.214,-0.203 -54.392,6.618 -29.373,6.618 v1@-28.448,7.544
  Bottom Layer w0.6: v1@-28.352,7.448 v1(-28.296,7.504)
2G: DS2.8 U2.13 | length 43.9
  Top Layer w0.6: v1@-28.296,6.096 -27.813,6.096 -26.594,4.877 U2.13@-24.514,4.877
  Bottom Layer w0.5: DS2.8@-64.231,-1.301 -63.424,-2.108 -61.9,-2.108 -54.454,5.337 -29.054,5.337 v1@-28.31,6.081
  other v1: -28.296,6.067
3.3V: C1.2 C2.2 C3.2 C4.2 C9.2 C13.2 C14.1 C15.1 C19.2 C21.1 C27.2 LCD1.10 P1.2 R2.1 R16.1 R21.2 R23_IR1.1 R23_IR2.1 R25_Led1.2 R25_Led2.2 R25_Led3.2 R30.1 R31.1 R33.1 R34_IR1.1 R34_IR2.1 S1.2 S1.5 S2.2 S2.5 S3.2 S4.2 S5.2 S8.2 U1.20 U2.20 U3.4 U3.14 U3.24 U3.34 U3.44 U3.54 U3.64 U3.74 U3.83 U3.94 U3.95 U4.4 U4.17 U5.3 U7.2 U8.8 U8.13 VR1_IR1.2 VR1_IR1.3 VR1_IR2.2 VR1_IR2.3 | length 565
  Top Layer w0.2: v1(-13.514,-5.298) -12.995,-5.817 -10.744,-5.817 -10.428,-5.5 U3.74@-7.55,-5.5 v1(-5.221,-5.5) ; U3.64@-7.55,-0.5 -6.46,-0.5 -6.02,-0.94 -6.02,-2.337 -5.588,-2.769 -3.2,-2.769 -3.124,-2.845 -2.337,-3.632 0.686,-3.632 ; U3.54@-7.55,4.5 -4.754,4.5 -4.737,4.483 -4.698,4.483 -3.734,3.519 -3.734,3.062 -3.746,3.049 -3.746,-2.096 v1(-3.124,-2.718) ; -5.055,-16.51 -5.055,-12.802 -2.5,-10.247 U3.83@-2.5,-7.55 ; U3.44@-3,7.55 -3,5.438 -1.854,4.293 1.372,4.293 v1(2,4.921) ; 0.737,-3.607 5.436,-3.607 6.329,-4.5 U3.4@7.55,-4.5 9.275,-4.5 12.788,-8.013 S3.2@13.632,-8.013 ; v1@2,13.049 U3.34@2,7.55 2,6.433 2.933,5.5 U3.24@7.55,5.5 ; 2.388,13.437 4.912,13.437 C19.2@5.131,13.655 ; U3.94@3,-7.55 3,-8.817 3.099,-8.915 3.404,-8.915 3.5,-8.819 U3.95@3.5,-7.55 3.5,-6.472 0.686,-3.658 0.686,-3.632 ; 5.169,17.386 5.385,17.602 U7.2@5.385,18.542 ; LCD1.10@17.939,2.365 15.903,2.365 14.038,0.5 U3.14@7.55,0.5 4.818,0.5 0.686,-3.632
  Top Layer w0.4: v1(-3.084,-25.492) -3.084,-22.621
  Top Layer w0.5: v1(-5.221,-5.5) -4.687,-5.5 -3.124,-3.937 -3.124,-2.845 v1(-3.124,-2.718) ; v1(1.93,13.132) 1.93,14.148 5.169,17.386 5.169,18.326 U7.2@5.385,18.542
  Top Layer w0.6: S2.5@-66.727,-19.255 -62.33,-14.857 ; S2.2@-61.339,-13.867 -62.33,-14.857 ; S4.2@-60.597,-22.334 -62.33,-20.601 -62.33,-14.857 ; U2.20@-24.514,-4.013 -22.758,-4.013 -21.539,-5.232 v1(-21.539,-7.722) ; v1(-15.682,28.677) -13.335,28.677 -12.319,27.661 VR1_IR2.2@-12.319,26.391 -12.319,22.682 -14.402,20.599 v1@-14.402,19.482 ; v1(-6.198,-44.628) -6.198,-44.653 -5.537,-45.314 S8.2@-5.537,-53.555 ; -5.055,-16.51 -5.055,-20.65 -3.084,-22.621 ; R25_Led3.2@6.868,31.521 6.868,31.181 7.95,30.099 10.561,30.099 11.618,31.156 12.725,30.048 15.203,30.048 R25_Led1.2@16.469,31.314 ; v1@16.053,11.328 14.834,11.328 13.995,12.167 13.995,23.444 17.831,27.28 17.831,30.023 16.469,31.384 R25_Led1.2@16.469,31.521 ; v1(22.589,-22.081) v1(22.589,-17.624)
  Top Layer w1: v1(-2.616,-17.501) 1.55,-17.501 S1.5@2.28,-16.771
  Bottom Layer w0.2: C15.1@23.09,14.71 24.457,14.71 25.603,13.564 25.603,11.201 24.982,10.58 U8.8@24.377,10.58 23.991,10.58 23.602,10.191 U8.13@23.602,7.805
  Bottom Layer w0.4: U4.17@-27.328,14.601 -25.556,14.601 -24.308,15.85 -24.308,18.567 -23.074,19.801 U4.4@-20.678,19.801 -14.812,19.801 R21.2@-14.376,19.365
  Bottom Layer w0.5: C13.2@11.608,-10.912 13.632,-8.887 S3.2@13.632,-8.013
  Bottom Layer w0.6: S5.2@-73.348,-9.38 -74.244,-10.276 -74.244,-15.265 -70.026,-19.483 S2.5@-67.413,-19.483 ; C2.2@-61.124,-25.185 -61.124,-22.861 S4.2@-60.597,-22.334 -58.685,-20.422 -27.102,-20.422 -24.943,-18.263 -25.756,-18.263 -26.416,-17.602 -26.416,-11.887 -22.276,-7.747 v1@-21.565,-7.747 ; v1(-21.539,-7.722) -21.539,-6.426 -17.678,-2.565 -16.358,-2.565 v1@-13.569,-5.354 ; VR1_IR2.2@-12.319,26.365 VR1_IR2.3@-9.779,26.365 ; v1(-6.198,-44.628) -6.198,-28.605 v1(-3.084,-25.492) ; R23_IR1.1@-5.928,28.6 -6.121,28.793 R34_IR2.1@-8.179,28.793 -8.179,27.965 VR1_IR2.3@-9.779,26.365 ; S8.2@-5.607,-53.555 3.493,-53.555 ; v1(1.854,28.88) 1.636,28.88 R34_IR1.1@1.6,28.844 ; C9.2@2.591,-55.362 2.591,-54.458 3.493,-53.555 ; U7.2@5.385,18.542 3.87,17.027 -3.083,17.027 -4.013,17.958 -4.013,22.657 -5.969,24.613 ; S8.2@5.393,-53.555 3.493,-53.555 ; v1(7.976,30.175) 3.912,30.175 2.581,28.844 R34_IR1.1@1.6,28.844 ; S1.2@9.417,-16.771 9.722,-16.771 12.116,-14.376 15.636,-14.376 13.632,-12.373 S3.2@13.632,-8.887 ; S3.2@13.632,-8.013 14.924,-8.013 15.697,-7.239 15.697,-6.431 C1.2@15.503,-6.236 ; R30.1@16.246,9.5 16.246,12.741 19.38,15.875 24.255,15.875 ; v1(22.589,-22.081) 23.749,-23.241 39.588,-23.241 R2.1@48.631,-14.199 ; C15.1@23.09,14.71 24.255,15.875 ; C27.2@28.653,6.646 29.074,6.646 30.353,7.925 30.353,10.109 ; R33.1@28.653,11.32 29.142,11.32 30.353,10.109 ; VR1_IR2.3@-9.779,26.365 -7.722,26.365 -5.969,24.613 ; -5.969,24.613 -3.2,24.613 -2.032,25.781 -2.032,26.314 0.508,26.314 1.6,27.407 R34_IR1.1@1.6,28.844 ; 24.255,15.875 28.931,15.875 30.353,14.453 30.353,10.109
  Bottom Layer w0.75: C21.1@-9.652,-17.551 -13.233,-13.97 -13.233,-10.897 -7.837,-5.5 v1(-5.221,-5.5) ; v1(-3.124,-2.718) -3.124,-0.889 2,4.235 v1(2,4.921) 2.896,5.817 2.896,11.989 C14.1@1.931,12.954
  Bottom Layer w1: C21.1@-9.652,-17.551 -9.602,-17.501 v1(-2.616,-17.501) ; v1(-3.084,-25.492) -2.083,-24.491 -2.083,-18.135 v1@-2.667,-17.551 ; S1.5@2.28,-16.771 13.289,-16.771 16.915,-20.396 19.816,-20.396 v1(22.589,-17.624)
  other v1: -25.019,-18.263 -0.787,-3.556 16.129,11.532 -14.249,19.329
5V: *_DriverMotor1.5 *_DriverMotor2.5 *_DriverMotor2.7 *_DriverMotor3.5 *_DriverMotor3.8 *_DriverMotor4.5 *_DriverMotor4.7 *_DriverMotor4.8 BL1_DriverMotor1.11 BL1_DriverMotor2.11 BL1_DriverMotor3.11 BL1_DriverMotor4.11 C5.2 C6.1 C11.2 C12.1 C16.1 C17.1 C18.2 C20.2 C23.2 C25.1 encoder1_DriverMotor1.3 encoder1_DriverMotor2.3 encoder1_DriverMotor3.3 encoder1_DriverMotor4.3 FB1.1 L1.2 LCD1.2 R14.2 R15.2 R19.2 R20.2 U4.20 U5.1 U6.4 | length 502.1
  Top Layer w0.6: v1(-52.304,-26.137) BL1_DriverMotor2.11@-50.02,-28.42 ; BL1_DriverMotor1.11@-47.538,23.401 -41.529,19.253 -40.589,18.517 -39.363,13.642 v1(-37.367,12.758) -37.367,12.16 C5.2@-36.104,10.897 ; encoder1_DriverMotor1.3@-43.546,29.526 -43.546,25.004 v1(-37.033,18.491) ; encoder1_DriverMotor2.3@-32.191,-48.605 -33.426,-49.84 -33.426,-53.823 -31.293,-55.956 -26.873,-55.956 -18.263,-47.346 -18.263,-43.488 *_DriverMotor2.7@-19.631,-42.119 ; 28.423,-46.558 encoder1_DriverMotor3.3@31.333,-48.981 ; *_DriverMotor4.8@33.544,24.028 33.949,24.434 36.246,22.123 40.098,22.111 43.79,25.803 encoder1_DriverMotor4.3@43.79,29.653 ; v2@33.82,-31.636 37.854,-35.669 BL1_DriverMotor3.11@42.746,-35.669 ; BL1_DriverMotor4.11@52.983,15.385 55.651,17.12 v1@55.702,18.948
  Top Layer w1: C20.2@-31.75,-32.984 v5@-31.75,-30.48 ; -21.833,-39.892 -18.415,-36.474 -18.067,-36.474 ; v1(-21.768,23.114) -21.742,23.139 -19.823,23.139 v1(-18.502,24.46) ; *_DriverMotor2.5@-15.912,-38.629 -13.266,-41.275 -4.318,-41.275 -3.302,-40.259 -3.302,-38.659 -1.7,-37.057 U6.4@-1.7,-35.712 -1.7,-32.184 -5.167,-28.717 U5.1@-6.309,-28.717 ; -1.7,-32.156 5.258,-32.156 13.767,-23.647 24.689,-23.647 ; *_DriverMotor3.8@12.752,-35.52 15.068,-33.203 ; *_DriverMotor3.8@17.321,-30.95 15.068,-33.203 ; *_DriverMotor3.5@18.14,-40.908 20.456,-38.592 ; *_DriverMotor3.5@22.709,-36.338 20.456,-38.592 ; v2(27.534,-31.572) v2@33.757,-31.572 ; 28.423,-46.558 20.456,-38.592 ; v2(31.293,-3.505) 29.997,-2.21 29.997,0.203 32.918,3.124 32.918,5.131 v2@32.283,5.766 ; v2(32.283,5.867) v2@32.283,5.766 ; v2@32.436,5.588 32.461,5.588 v2@32.283,5.766 ; 15.068,-33.203 20.456,-38.592
  Top Layer w2: *_DriverMotor1.5@-32.056,19.803 *_DriverMotor1.5@-27.487,24.372 ; v1(-24.074,-37.652) -21.833,-39.892 *_DriverMotor2.7@-19.504,-42.221 ; *_DriverMotor2.5@-20.481,-34.06 -18.067,-36.474 *_DriverMotor2.5@-15.912,-38.629 ; *_DriverMotor4.5@23.989,23.618 26.255,21.352 *_DriverMotor4.5@28.559,19.048 ; LCD1.2@25.273,-4.928 24.689,-5.512 24.689,-28.727 v2(27.534,-31.572) ; *_DriverMotor4.7@27.796,27.424 28.494,28.122 ; *_DriverMotor4.8@29.066,28.694 28.494,28.122 ; v2(30.556,25.53) 30.556,25.603 30.785,25.832 28.509,28.107 28.494,28.122 ; v2@30.963,25.654 33.063,23.553 ; *_DriverMotor4.7@32.416,22.905 33.063,23.553 ; *_DriverMotor4.8@33.544,24.028 33.539,24.028 33.063,23.553
  Bottom Layer w0.4: C6.1@-37.642,12.751 -35.585,14.808 -30.378,14.808 -28.636,16.551 U4.20@-27.328,16.551
  Bottom Layer w0.6: C6.1@-37.77,12.758 -37.77,15.545 -36.967,16.347 -36.993,16.373 R19.2@-36.993,18.567 -36.993,19.599 -35.941,20.65 -32.106,20.65 v1(-31.699,20.244) ; R14.2@-8.407,19.06 R15.2@-6.248,19.06 ; R15.2@-6.068,19.352 -4.851,18.136 -4.851,17.018 -3.861,16.027 ; C18.2@1.397,-27.066 3.214,-25.249 L1.2@3.353,-25.249 4.497,-24.105 12.522,-24.105 13.564,-25.146 13.716,-25.146 C17.1@13.843,-25.019
  Bottom Layer w1: v1(-52.304,-26.137) -50.882,-24.714 -37.44,-24.714 v5(-31.674,-30.48) ; C16.1@-31.267,-30.48 -24.135,-37.612 v1@-24.034,-37.612 ; v1(-28.753,23.114) v1(-21.768,23.114) ; v1@-18.313,24.587 -11.836,24.587 -9.881,22.631 -9.881,19.406 -9.535,19.06 R14.2@-8.56,19.06 ; -3.861,16.027 13.614,16.027 19.228,21.641 v2(26.543,21.641) ; C17.1@13.843,-25.019 18.212,-25.019 19.736,-26.543 19.736,-28.6 v1@17.069,-31.267 ; v1(22.581,-36.474) 22.631,-36.474 v2(27.534,-31.572) ; LCD1.2@25.06,-4.882 25.766,-5.588 28.651,-5.588 30.62,-3.619 v2@31.483,-3.619 ; C11.2@32.297,-26.707 32.297,-30.041 v2(33.856,-31.6) ; 37.033,18.999 v1(55.524,18.999)
  Bottom Layer w2: v2(26.543,21.641) C25.1@30.302,25.4 ; v2(30.556,25.53) 33.63,22.457 33.63,9.144 32.283,7.798 v2(32.283,5.867) ; 33.376,22.657 37.033,18.999
  other v1: 17.196,-31.039 33.553,15.951 -8.407,19.116